# Altium PCB Board.PcbDoc (part 3 of 3)
Units mm, origin at the board's own origin, x right, y up, seen from the top; angles counter-clockwise.
Board outline 220 x 125 mm, 2 copper layers (Top Layer, Bottom Layer); 325 components, 197 nets, 1030 pads, 170 vias.
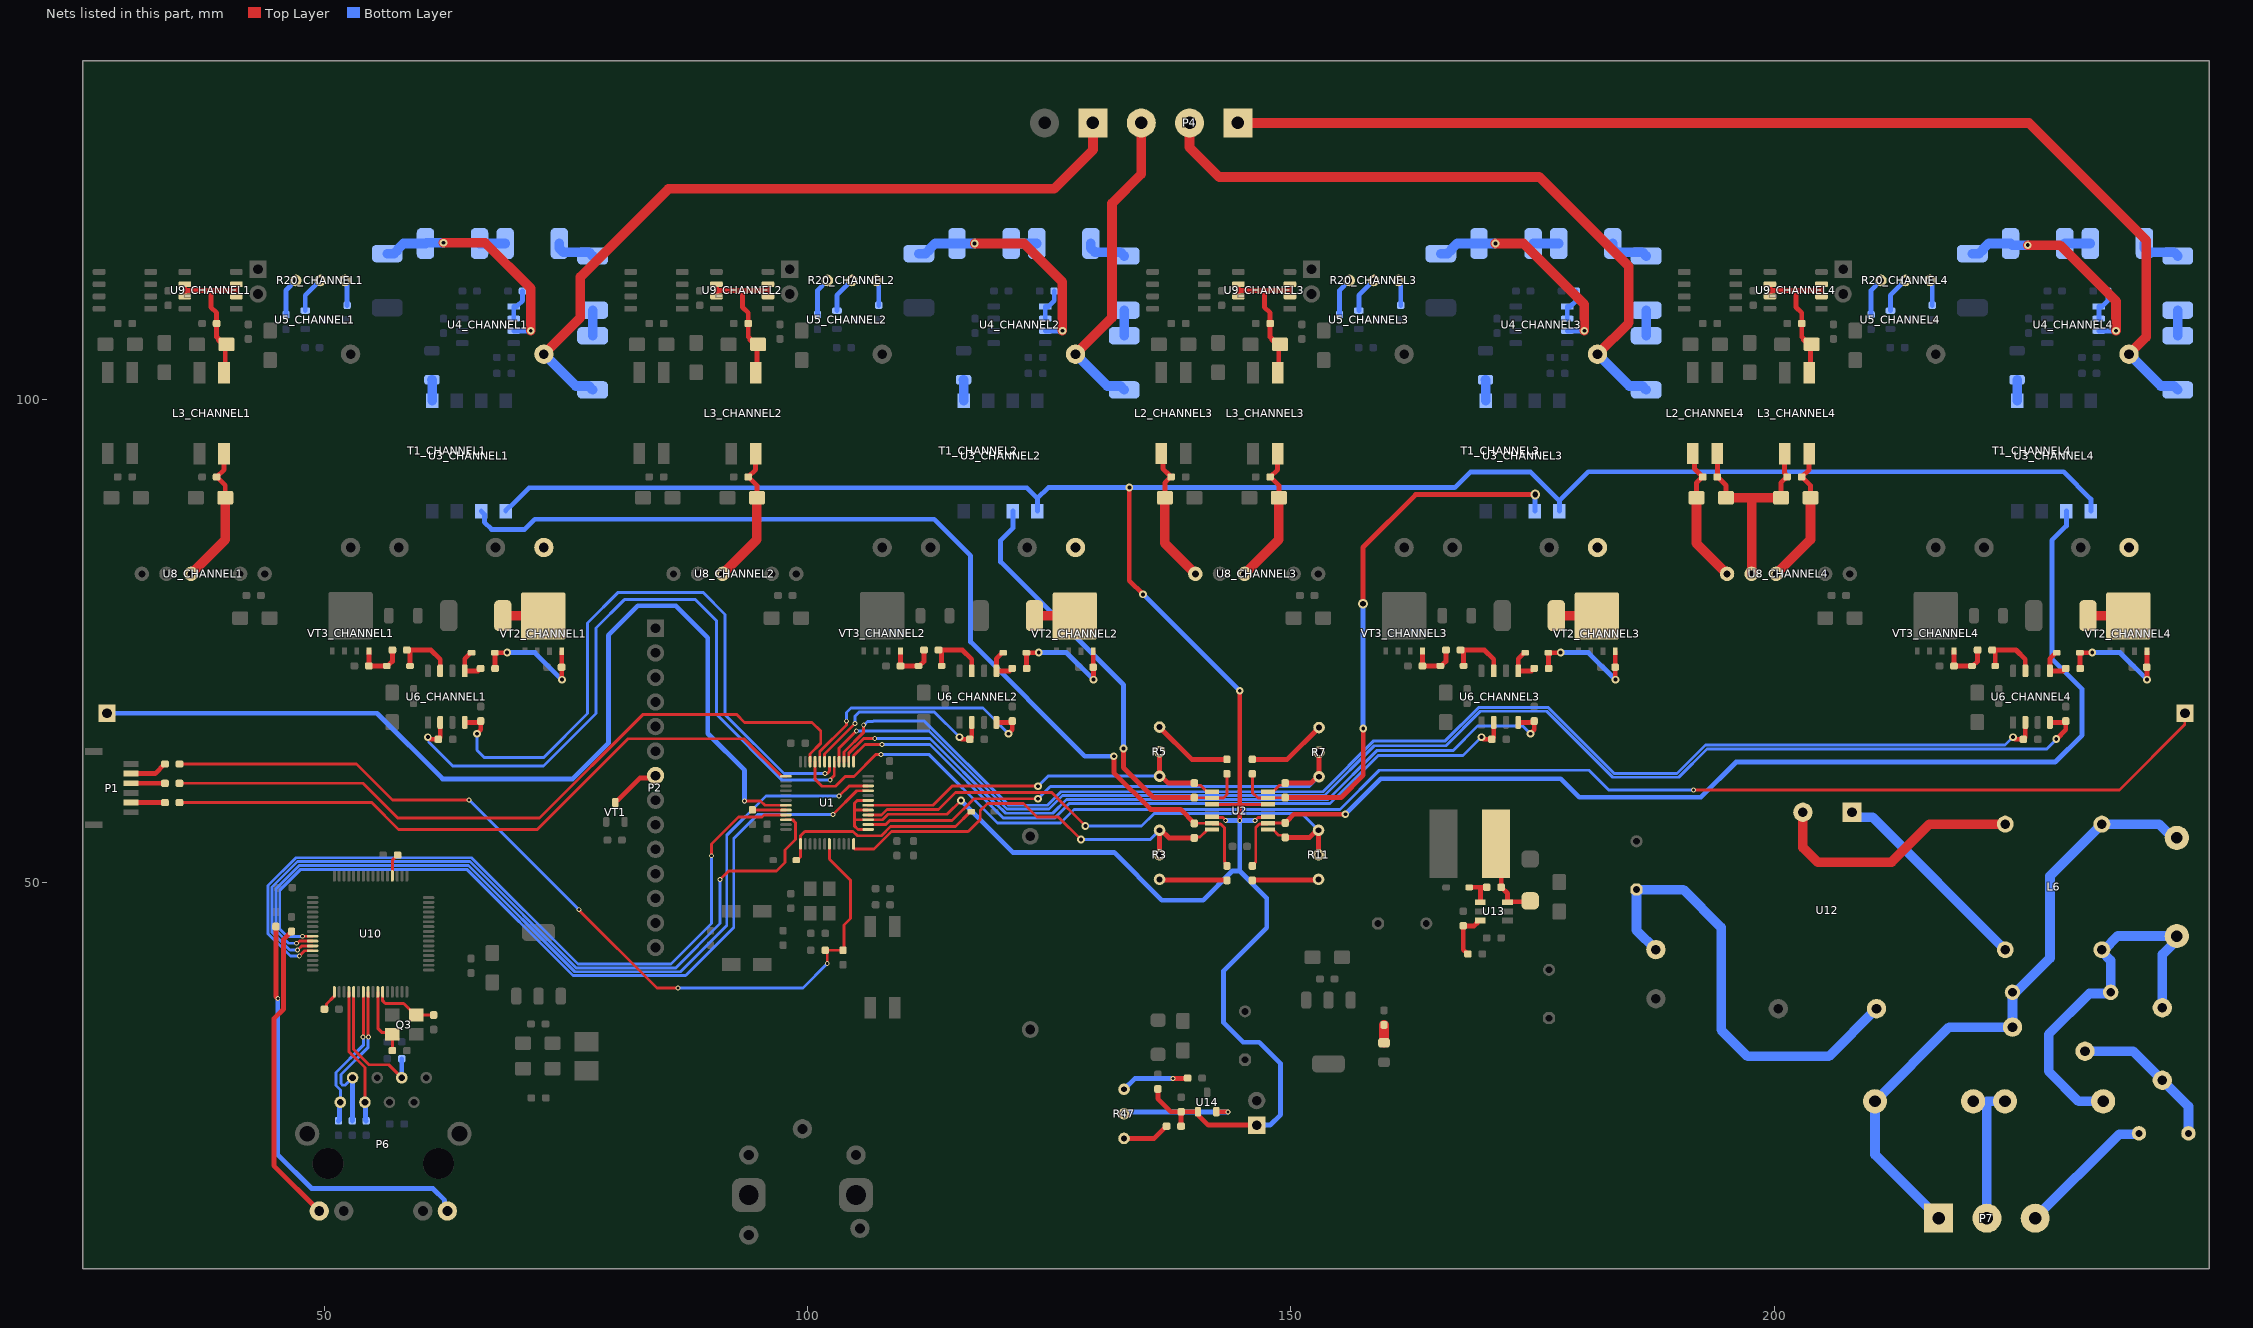
[diagram p3: the nets of this part, all layers, seen from the top]

## Via types
v1: diameter 0.8, hole 0.4, Top Layer to Bottom Layer, 99 vias
v2: diameter 0.5, hole 0.3, Top Layer to Bottom Layer, 49 vias
v3: diameter 1, hole 0.6, Top Layer to Bottom Layer, 22 vias

## Nets (pads, with @x,y where several pads share a name; then routed paths per layer and width w, separated by ;. In a path a pad name is that pad's centre, name@x,y a point inside that pad or via, vN(x,y) a via of type N, cw(c..) or ccw(c..) an arc to the next point about the centre after c; other vN are vias at no path point) (continued)
NetC24_CHANNEL3_2: C24_CHANNEL3.2 C25_CHANNEL3.1 L2_CHANNEL3.3 U8_CHANNEL3.6 | length 14.5
  Top Layer w0.5: L2_CHANNEL3.3@136.583,94.361 136.747,94.197 136.747,92.804 137.453,92.098 137.453,92.073 C24_CHANNEL3.2@137.578,91.948 ; C25_CHANNEL3.1@136.955,89.789 136.955,91.325 C24_CHANNEL3.2@137.578,91.948 ; C24_CHANNEL3.2@137.603,91.948 C24_CHANNEL3.2@137.578,91.948
  Top Layer w1: C25_CHANNEL3.1@136.955,89.789 136.955,85.075 U8_CHANNEL3.6@140.115,81.915
NetC24_CHANNEL4_1: C24_CHANNEL4.1 C25_CHANNEL4.2 C28_CHANNEL4.2 C29_CHANNEL4.1 L2_CHANNEL4.4 L3_CHANNEL4.3 U8_CHANNEL4.5 | length 23.6
  Top Layer w0.5: C24_CHANNEL4.1@194.103,91.948 C24_CHANNEL4.1@194.128,91.948 ; L2_CHANNEL4.4@194.128,94.607 C24_CHANNEL4.1@194.128,91.948 ; C25_CHANNEL4.2@195.005,89.789 195.005,91.071 C24_CHANNEL4.1@194.128,91.948 ; C29_CHANNEL4.1@200.694,89.789 200.694,91.325 C28_CHANNEL4.2@201.317,91.948 ; L3_CHANNEL4.3@201.072,94.335 201.072,92.366 201.192,92.246 201.192,92.073 C28_CHANNEL4.2@201.317,91.948 ; C28_CHANNEL4.2@201.342,91.948 C28_CHANNEL4.2@201.317,91.948
  Top Layer w1: C25_CHANNEL4.2@195.005,89.789 C29_CHANNEL4.1@200.694,89.789 ; U8_CHANNEL4.5@197.655,81.915 197.655,89.709
NetC24_CHANNEL4_2: C24_CHANNEL4.2 C25_CHANNEL4.1 L2_CHANNEL4.3 U8_CHANNEL4.6 | length 14.5
  Top Layer w0.5: L2_CHANNEL4.3@191.583,94.361 191.747,94.197 191.747,92.804 192.453,92.098 192.453,92.073 C24_CHANNEL4.2@192.578,91.948 ; C25_CHANNEL4.1@191.955,89.789 191.955,91.325 C24_CHANNEL4.2@192.578,91.948 ; C24_CHANNEL4.2@192.603,91.948 C24_CHANNEL4.2@192.578,91.948
  Top Layer w1: C25_CHANNEL4.1@191.955,89.789 191.955,85.075 U8_CHANNEL4.6@195.115,81.915
NetC28_CHANNEL1_1: C28_CHANNEL1.1 C29_CHANNEL1.2 L3_CHANNEL1.4 U8_CHANNEL1.4 | length 14.6
  Top Layer w0.5: C28_CHANNEL1.1@38.842,91.948 C28_CHANNEL1.1@38.867,91.948 ; L3_CHANNEL1.4@39.612,94.335 39.612,92.693 C28_CHANNEL1.1@38.867,91.948 ; C29_CHANNEL1.2@39.744,89.789 39.744,91.071 C28_CHANNEL1.1@38.867,91.948
  Top Layer w1: U8_CHANNEL1.4@36.195,81.915 39.744,85.464 C29_CHANNEL1.2@39.744,89.789
NetC28_CHANNEL2_1: C28_CHANNEL2.1 C29_CHANNEL2.2 L3_CHANNEL2.4 U8_CHANNEL2.4 | length 14.6
  Top Layer w0.5: C28_CHANNEL2.1@93.842,91.948 C28_CHANNEL2.1@93.867,91.948 ; L3_CHANNEL2.4@94.612,94.335 94.612,92.693 C28_CHANNEL2.1@93.867,91.948 ; C29_CHANNEL2.2@94.744,89.789 94.744,91.071 C28_CHANNEL2.1@93.867,91.948
  Top Layer w1: U8_CHANNEL2.4@91.195,81.915 94.744,85.464 C29_CHANNEL2.2@94.744,89.789
NetC28_CHANNEL3_1: C28_CHANNEL3.1 C29_CHANNEL3.2 L3_CHANNEL3.4 U8_CHANNEL3.4 | length 14.6
  Top Layer w0.5: C28_CHANNEL3.1@147.842,91.948 C28_CHANNEL3.1@147.867,91.948 ; L3_CHANNEL3.4@148.612,94.335 148.612,92.693 C28_CHANNEL3.1@147.867,91.948 ; C29_CHANNEL3.2@148.744,89.789 148.744,91.071 C28_CHANNEL3.1@147.867,91.948
  Top Layer w1: U8_CHANNEL3.4@145.195,81.915 148.744,85.464 C29_CHANNEL3.2@148.744,89.789
NetC28_CHANNEL4_1: C28_CHANNEL4.1 C29_CHANNEL4.2 L3_CHANNEL4.4 U8_CHANNEL4.4 | length 14.6
  Top Layer w0.5: C28_CHANNEL4.1@202.842,91.948 C28_CHANNEL4.1@202.867,91.948 ; L3_CHANNEL4.4@203.612,94.335 203.612,92.693 C28_CHANNEL4.1@202.867,91.948 ; C29_CHANNEL4.2@203.744,89.789 203.744,91.071 C28_CHANNEL4.1@202.867,91.948
  Top Layer w1: U8_CHANNEL4.4@200.195,81.915 203.744,85.464 C29_CHANNEL4.2@203.744,89.789
NetC30_CHANNEL1_1: C30_CHANNEL1.1 C31_CHANNEL1.2 L3_CHANNEL1.1 U9_CHANNEL1.2 U9_CHANNEL1.3 U9_CHANNEL1.6 U9_CHANNEL1.7 | length 17.1
  Top Layer w0.5: U9_CHANNEL1.7@35.552,110.617 35.552,111.252 ; U9_CHANNEL1.6@35.552,111.887 35.552,111.252 ; L3_CHANNEL1.1@39.612,102.735 39.74,102.862 39.74,105.536 C31_CHANNEL1.2@39.867,105.664 ; C31_CHANNEL1.2@39.617,105.664 39.492,105.664 39.042,106.114 39.042,106.239 38.842,106.439 C30_CHANNEL1.1@38.842,107.823 38.842,108.933 38.25,109.525 38.25,111.252 ; U9_CHANNEL1.2@40.886,110.617 40.886,111.252 ; U9_CHANNEL1.3@40.886,111.887 40.886,111.252 ; 35.552,111.252 38.25,111.252 ; 38.25,111.252 40.886,111.252
NetC30_CHANNEL2_1: C30_CHANNEL2.1 C31_CHANNEL2.2 L3_CHANNEL2.1 U9_CHANNEL2.2 U9_CHANNEL2.3 U9_CHANNEL2.6 U9_CHANNEL2.7 | length 17.1
  Top Layer w0.5: U9_CHANNEL2.7@90.552,110.617 90.552,111.252 ; U9_CHANNEL2.6@90.552,111.887 90.552,111.252 ; L3_CHANNEL2.1@94.612,102.735 94.74,102.862 94.74,105.536 C31_CHANNEL2.2@94.867,105.664 ; C31_CHANNEL2.2@94.617,105.664 94.492,105.664 94.042,106.114 94.042,106.239 93.842,106.439 C30_CHANNEL2.1@93.842,107.823 93.842,108.933 93.25,109.525 93.25,111.252 ; U9_CHANNEL2.2@95.886,110.617 95.886,111.252 ; U9_CHANNEL2.3@95.886,111.887 95.886,111.252 ; 90.552,111.252 93.25,111.252 ; 93.25,111.252 95.886,111.252
NetC30_CHANNEL3_1: C30_CHANNEL3.1 C31_CHANNEL3.2 L3_CHANNEL3.1 U9_CHANNEL3.2 U9_CHANNEL3.3 U9_CHANNEL3.6 U9_CHANNEL3.7 | length 17.1
  Top Layer w0.5: U9_CHANNEL3.7@144.552,110.617 144.552,111.252 ; U9_CHANNEL3.6@144.552,111.887 144.552,111.252 ; L3_CHANNEL3.1@148.612,102.735 148.74,102.862 148.74,105.536 C31_CHANNEL3.2@148.867,105.664 ; C31_CHANNEL3.2@148.617,105.664 148.492,105.664 148.042,106.114 148.042,106.239 147.842,106.439 C30_CHANNEL3.1@147.842,107.823 147.842,108.933 147.25,109.525 147.25,111.252 ; U9_CHANNEL3.2@149.886,110.617 149.886,111.252 ; U9_CHANNEL3.3@149.886,111.887 149.886,111.252 ; 144.552,111.252 147.25,111.252 ; 147.25,111.252 149.886,111.252
NetC30_CHANNEL4_1: C30_CHANNEL4.1 C31_CHANNEL4.2 L3_CHANNEL4.1 U9_CHANNEL4.2 U9_CHANNEL4.3 U9_CHANNEL4.6 U9_CHANNEL4.7 | length 17.1
  Top Layer w0.5: U9_CHANNEL4.7@199.552,110.617 199.552,111.252 ; U9_CHANNEL4.6@199.552,111.887 199.552,111.252 ; L3_CHANNEL4.1@203.612,102.735 203.74,102.862 203.74,105.536 C31_CHANNEL4.2@203.867,105.664 ; C31_CHANNEL4.2@203.617,105.664 203.492,105.664 203.042,106.114 203.042,106.239 202.842,106.439 C30_CHANNEL4.1@202.842,107.823 202.842,108.933 202.25,109.525 202.25,111.252 ; U9_CHANNEL4.2@204.886,110.617 204.886,111.252 ; U9_CHANNEL4.3@204.886,111.887 204.886,111.252 ; 199.552,111.252 202.25,111.252 ; 202.25,111.252 204.886,111.252
NetC36_2: C36.2 U10.36 | length 2.4
  Top Layer w0.3: U10.36@57.025,50.675 57.025,52.28 57.57,52.825 C36.2@57.575,52.825
NetC37_2: C37.2 Q3.1 U10.10 | length 7.2
  Top Layer w0.3: U10.10@55.525,38.675 55.525,34.9 55.976,34.449 56.826,34.449 57.025,34.25 C37.2@57.025,32.6
NetC38_2: C38.2 Q3.3 U10.11 | length 6.8
  Top Layer w0.3: U10.11@56.025,38.675 56.025,37.751 56.301,37.475 58.2,37.475 59.4,36.275 Q3.3@59.5,36.275 C38.2@61.3,36.275
NetC44_1: C44.1 C48.2 L6.2 P7.1 R43.1 Vr1.1 | length 65.4
  Bottom Layer w1: P7.1@217,15.25 210.42,21.83 C48.2@210.42,27.35 218.095,35.025 Vr1.1@224.65,35.025 224.65,38.275 228.525,42.15 228.525,50.65 L6.2@233.9,56.025 239.824,56.025 241.244,54.605 C44.1@241.65,54.605
NetC44_2: C44.2 C49.2 L6.1 R43.2 Th1.2 | length 40.1
  Bottom Layer w1: C49.2@234.03,27.35 231.5,27.35 228.4,30.45 228.4,34.3 232.61,38.51 234.69,38.51 R43.2@234.805,38.625 234.805,41.917 233.9,42.822 L6.1@233.9,43.025 234.103,43.025 235.523,44.445 C44.2@241.65,44.445 241.65,44.039 240.15,42.539 Th1.2@240.15,37.025
NetC45_1: C45.1 L5.1 U12.3 | length 47.3
  Bottom Layer w1: L5.1@187.75,43.04 185.75,45.04 C45.1@185.75,49.25 190.6,49.25 194.5,45.35 194.5,34.75 197.25,32 205.65,32 U12.3@210.58,36.93
NetC48_1: C48.1 C49.1 P7.2 | length 14
  Bottom Layer w1: P7.2@222,15.25 222,27.325 222.025,27.35 C49.1@223.87,27.35
NetC50_1: C50.1 U13.1 VD5.2 | length 3.3
  Top Layer w0.5: VD5.2@168.45,49.475 168.463,49.487 170.237,49.487 C50.1@170.25,49.5 ; U13.1@169.6,47.95 169.6,49.425
NetC50_2: C50.2 L7.1 U13.6 VD6.2 | length 9
  Top Layer w0.5: L7.1@171.2,54 171.75,53.45 C50.2@171.75,49.5 171.775,49.5 172.4,48.875 U13.6@172.4,47.95 172.45,48 174.659,48 VD6.2@174.75,48.091
NetF1_1: F1.1 P7.3 | length 14.4
  Bottom Layer w1: P7.3@227,15.25 235.679,23.929 237.639,23.929 F1.1@237.735,24.025
NetF1_2: F1.2 Th1.1 Vr1.2 | length 15.9
  Bottom Layer w1: Vr1.2@232.15,32.525 237.15,32.525 Th1.1@240.15,29.525 242.855,26.82 F1.2@242.855,24.025
NetL6_3: L6.3 U12.2 | length 26.8
  Top Layer w1: U12.2@202.96,57.25 202.96,53.615 204.486,52.089 212.124,52.089 216.059,56.025 L6.3@223.9,56.025
NetL6_4: L6.4 U12.1 | length 21.8
  Bottom Layer w1: U12.1@208.04,57.25 208.54,56.75 210.175,56.75 L6.4@223.9,43.025
NetP1_2: P1.2 R15.1 | length 3.9
  Top Layer w0.5: P1.2@30,61.25 32.475,61.25 33.475,62.25 R15.1@33.5,62.25
NetP1_3: P1.3 R14.1 | length 3.5
  Top Layer w0.5: P1.3@30,60.25 R14.1@33.5,60.25
NetP1_5: P1.5 R13.1 | length 3.5
  Top Layer w0.5: P1.5@30,58.25 R13.1@33.5,58.25
NetP2_7: P2.7 VT1.3 | length 5.4
  Top Layer w0.5: VT1.3@80.083,58.267 VT1.3@80.1,58.25 80.1,58.425 80.175,58.5 80.35,58.5 82.641,60.791 84.001,60.791 P2.7@84.25,61.04
NetP6_9: P6.9 R39.2 | length 31.6
  Top Layer w0.5: R39.2@46.6,44.925 46.6,44.9 46.475,44.775 46.45,44.775 45.775,44.1 45.775,36.9 44.775,35.9 44.775,20.685 P6.9@49.46,16
NetP6_12: P6.12 R41.2 | length 44.1
  Top Layer w0.5: R41.2@44.975,45.425 44.975,38.175 v2(45.175,37.975)
  Bottom Layer w0.5: v2(45.175,37.975) 45.175,21.825 48.675,18.325 61.225,18.325 62.433,17.117 62.433,16.287 P6.12@62.72,16
NetP9_1: P9.1 U1.43 | length 103.2
  Top Layer w0.3: v2(93.472,58.42) 95.123,58.42 95.568,57.975 U1.43@97.75,57.975
  Bottom Layer w0.5: P9.1@27.5,67.5 55.436,67.5 62.23,60.706 75.692,60.706 79.375,64.389 79.375,75.565 82.423,78.613 86.36,78.613 89.662,75.311 89.662,65.405 93.472,61.595 v2(93.472,58.42)
NetP10_1: P10.1 U1.33 | length 155.2
  Top Layer w0.3: U1.33@100.75,62.475 100.75,60.667 101.473,59.944 102.87,59.944 103.886,60.96 104.775,60.96 107.061,63.246 v2(107.569,63.246) ; v2(191.643,59.563) 235.712,59.563 242.475,66.326 242.475,67.475 P10.1@242.5,67.5
  Bottom Layer w0.3: v2(107.569,63.246) 112.522,63.246 119.634,56.134 126.15,56.134 127.547,57.531 155.067,57.531 159.131,61.595 180.848,61.595 182.88,59.563 v2(191.643,59.563)
NetR3_1: R3.1 R4.2 | length 7
  Top Layer w0.5: R3.1@136.4,50.31 136.455,50.255 143.32,50.255 R4.2@143.375,50.2
NetR5_1: R5.1 R6.2 | length 8.4
  Top Layer w0.5: R5.1@136.4,66.065 139.74,62.725 R6.2@143.375,62.725
NetR7_1: R7.1 R8.2 | length 8.3
  Top Layer w0.5: R8.2@146,62.725 149.61,62.725 R7.1@152.9,66.015
NetR9_1: R9.1 U1.44 | length 3.6
  Top Layer w0.3: R9.1@94.175,57.45 94.2,57.475 U1.44@97.75,57.475
NetR11_1: R11.1 R12.2 | length 6.9
  Top Layer w0.5: R12.2@146,50.2 146.055,50.255 152.795,50.255 R11.1@152.85,50.31
NetR17_CHANNEL1_1: R17_CHANNEL1.1 U4_CHANNEL1.1 U4_CHANNEL1.2 | length 3.4
  Bottom Layer w0.5: U4_CHANNEL1.2@69.584,108.327 69.584,109.567 69.599,109.582 U4_CHANNEL1.1@69.9,109.582 ; U4_CHANNEL1.1@69.9,109.583 69.969,109.652 70.5,110.182 R17_CHANNEL1.1@70.5,111.172
NetR17_CHANNEL2_1: R17_CHANNEL2.1 U4_CHANNEL2.1 U4_CHANNEL2.2 | length 3.4
  Bottom Layer w0.5: U4_CHANNEL2.2@124.584,108.327 124.584,109.567 124.599,109.582 U4_CHANNEL2.1@124.9,109.582 ; U4_CHANNEL2.1@124.9,109.583 124.969,109.652 125.5,110.182 R17_CHANNEL2.1@125.5,111.172
NetR17_CHANNEL3_1: R17_CHANNEL3.1 U4_CHANNEL3.1 U4_CHANNEL3.2 | length 3.4
  Bottom Layer w0.5: U4_CHANNEL3.2@178.584,108.327 178.584,109.567 178.599,109.582 U4_CHANNEL3.1@178.9,109.582 ; U4_CHANNEL3.1@178.9,109.583 U4_CHANNEL3.1@178.969,109.652 ; U4_CHANNEL3.1@178.97,109.652 179.5,110.182 R17_CHANNEL3.1@179.5,111.172
NetR17_CHANNEL4_1: R17_CHANNEL4.1 U4_CHANNEL4.1 U4_CHANNEL4.2 | length 3.4
  Bottom Layer w0.5: U4_CHANNEL4.2@233.584,108.327 233.584,109.567 233.599,109.582 U4_CHANNEL4.1@233.9,109.582 ; U4_CHANNEL4.1@233.9,109.583 233.969,109.652 234.5,110.182 R17_CHANNEL4.1@234.5,111.172
NetR18_CHANNEL1_2: R18_CHANNEL1.2 U3_CHANNEL1.1 | length 2.2
  Bottom Layer w1: R18_CHANNEL1.2@61.125,102 61.145,102 U3_CHANNEL1.1@61.145,99.839
NetR18_CHANNEL2_2: R18_CHANNEL2.2 U3_CHANNEL2.1 | length 2.2
  Bottom Layer w1: R18_CHANNEL2.2@116.125,102 116.145,102 U3_CHANNEL2.1@116.145,99.839
NetR18_CHANNEL3_2: R18_CHANNEL3.2 U3_CHANNEL3.1 | length 2.2
  Bottom Layer w1: R18_CHANNEL3.2@170.125,102 170.145,102 U3_CHANNEL3.1@170.145,99.839
NetR18_CHANNEL4_2: R18_CHANNEL4.2 U3_CHANNEL4.1 | length 2.2
  Bottom Layer w1: R18_CHANNEL4.2@225.125,102 225.145,102 U3_CHANNEL4.1@225.145,99.839
NetR19_CHANNEL1_1: R19_CHANNEL1.1 R20_CHANNEL1.1 | length 2.7
  Bottom Layer w0.5: R20_CHANNEL1.1@52.115,112.275 52.115,112.086 52.35,111.851 R19_CHANNEL1.1@52.35,109.7
NetR19_CHANNEL2_1: R19_CHANNEL2.1 R20_CHANNEL2.1 | length 2.7
  Bottom Layer w0.5: R20_CHANNEL2.1@107.115,112.275 107.115,112.086 107.35,111.851 R19_CHANNEL2.1@107.35,109.7
NetR19_CHANNEL3_1: R19_CHANNEL3.1 R20_CHANNEL3.1 | length 2.7
  Bottom Layer w0.5: R20_CHANNEL3.1@161.115,112.275 161.115,112.086 161.35,111.851 R19_CHANNEL3.1@161.35,109.7
NetR19_CHANNEL4_1: R19_CHANNEL4.1 R20_CHANNEL4.1 | length 2.7
  Bottom Layer w0.5: R20_CHANNEL4.1@216.115,112.275 216.115,112.086 216.35,111.851 R19_CHANNEL4.1@216.35,109.7
NetR20_CHANNEL1_2: R20_CHANNEL1.2 U5_CHANNEL1.2 | length 3.8
  Bottom Layer w0.5: U5_CHANNEL1.2@48.022,109.154 48.022,110.722 R20_CHANNEL1.2@49.575,112.275
NetR20_CHANNEL1_3: R20_CHANNEL1.3 R21_CHANNEL1.2 | length 4
  Bottom Layer w0.5: R21_CHANNEL1.2@46.025,108.725 46.025,111.265 R20_CHANNEL1.3@47.035,112.275
NetR20_CHANNEL2_2: R20_CHANNEL2.2 U5_CHANNEL2.2 | length 3.8
  Bottom Layer w0.5: U5_CHANNEL2.2@103.022,109.154 103.022,110.722 R20_CHANNEL2.2@104.575,112.275
NetR20_CHANNEL2_3: R20_CHANNEL2.3 R21_CHANNEL2.2 | length 4
  Bottom Layer w0.5: R21_CHANNEL2.2@101.025,108.725 101.025,111.265 R20_CHANNEL2.3@102.035,112.275
NetR20_CHANNEL3_2: R20_CHANNEL3.2 U5_CHANNEL3.2 | length 3.8
  Bottom Layer w0.5: U5_CHANNEL3.2@157.022,109.154 157.022,110.722 R20_CHANNEL3.2@158.575,112.275
NetR20_CHANNEL3_3: R20_CHANNEL3.3 R21_CHANNEL3.2 | length 4
  Bottom Layer w0.5: R21_CHANNEL3.2@155.025,108.725 155.025,111.265 R20_CHANNEL3.3@156.035,112.275
NetR20_CHANNEL4_2: R20_CHANNEL4.2 U5_CHANNEL4.2 | length 3.8
  Bottom Layer w0.5: U5_CHANNEL4.2@212.022,109.154 212.022,110.722 R20_CHANNEL4.2@213.575,112.275
NetR20_CHANNEL4_3: R20_CHANNEL4.3 R21_CHANNEL4.2 | length 4
  Bottom Layer w0.5: R21_CHANNEL4.2@210.025,108.725 210.025,111.265 R20_CHANNEL4.3@211.035,112.275
NetR23_CHANNEL1_1: R23_CHANNEL1.1 U6_CHANNEL1.5 VD3_CHANNEL1.2 | length 4
  Top Layer w0.5: VD3_CHANNEL1.2@65.225,73.75 65.125,73.75 64.516,73.141 U6_CHANNEL1.5@64.516,71.882 65.883,71.882 66.132,72.131 R23_CHANNEL1.1@66.157,72.131
NetR23_CHANNEL1_2: R23_CHANNEL1.2 R25_CHANNEL1.2 VD3_CHANNEL1.1 VT2_CHANNEL1.1 | length 12.7
  Top Layer w0.5: R23_CHANNEL1.2@67.657,72.131 67.641,72.147 67.641,73.734 VD3_CHANNEL1.1@67.625,73.75 68.875,73.75 v1(68.9,73.775) ; VT2_CHANNEL1.1@74.549,73.914 74.549,72.275 74.556,72.268 74.556,70.994 v1(74.575,70.975)
  Bottom Layer w0.5: v1(68.9,73.775) 71.775,73.775 v1(74.575,70.975)
NetR23_CHANNEL2_1: R23_CHANNEL2.1 U6_CHANNEL2.5 VD3_CHANNEL2.2 | length 4
  Top Layer w0.5: VD3_CHANNEL2.2@120.225,73.75 120.125,73.75 119.516,73.141 U6_CHANNEL2.5@119.516,71.882 120.883,71.882 121.132,72.131 R23_CHANNEL2.1@121.157,72.131
NetR23_CHANNEL2_2: R23_CHANNEL2.2 R25_CHANNEL2.2 VD3_CHANNEL2.1 VT2_CHANNEL2.1 | length 12.7
  Top Layer w0.5: R23_CHANNEL2.2@122.657,72.131 122.641,72.147 122.641,73.734 VD3_CHANNEL2.1@122.625,73.75 123.875,73.75 v1(123.9,73.775) ; VT2_CHANNEL2.1@129.549,73.914 129.549,72.275 129.556,72.268 129.556,70.994 v1(129.575,70.975)
  Bottom Layer w0.5: v1(123.9,73.775) 126.775,73.775 v1(129.575,70.975)
NetR23_CHANNEL3_1: R23_CHANNEL3.1 U6_CHANNEL3.5 VD3_CHANNEL3.2 | length 4
  Top Layer w0.5: VD3_CHANNEL3.2@174.225,73.75 174.125,73.75 173.516,73.141 U6_CHANNEL3.5@173.516,71.882 174.883,71.882 175.132,72.131 R23_CHANNEL3.1@175.157,72.131
NetR23_CHANNEL3_2: R23_CHANNEL3.2 R25_CHANNEL3.2 VD3_CHANNEL3.1 VT2_CHANNEL3.1 | length 12.7
  Top Layer w0.5: R23_CHANNEL3.2@176.657,72.131 176.641,72.147 176.641,73.734 VD3_CHANNEL3.1@176.625,73.75 177.875,73.75 v1(177.9,73.775) ; VT2_CHANNEL3.1@183.549,73.914 183.549,72.275 183.556,72.268 183.556,70.994 v1(183.575,70.975)
  Bottom Layer w0.5: v1(177.9,73.775) 180.775,73.775 v1(183.575,70.975)
NetR23_CHANNEL4_1: R23_CHANNEL4.1 U6_CHANNEL4.5 VD3_CHANNEL4.2 | length 4
  Top Layer w0.5: VD3_CHANNEL4.2@229.225,73.75 229.125,73.75 228.516,73.141 U6_CHANNEL4.5@228.516,71.882 229.883,71.882 230.132,72.131 R23_CHANNEL4.1@230.157,72.131
NetR23_CHANNEL4_2: R23_CHANNEL4.2 R25_CHANNEL4.2 VD3_CHANNEL4.1 VT2_CHANNEL4.1 | length 12.7
  Top Layer w0.5: R23_CHANNEL4.2@231.657,72.131 231.641,72.147 231.641,73.734 VD3_CHANNEL4.1@231.625,73.75 232.875,73.75 v1(232.9,73.775) ; VT2_CHANNEL4.1@238.549,73.914 238.549,72.275 238.556,72.268 238.556,70.994 v1(238.575,70.975)
  Bottom Layer w0.5: v1(232.9,73.775) 235.775,73.775 v1(238.575,70.975)
NetR24_CHANNEL1_2: R24_CHANNEL1.2 T1_CHANNEL1.6 VT2_CHANNEL1.2 | length 4.2
  Top Layer w1: R24_CHANNEL1.2@68.459,77.597 72.611,77.597 VT2_CHANNEL1.2@72.644,77.564
NetR24_CHANNEL2_2: R24_CHANNEL2.2 T1_CHANNEL2.6 VT2_CHANNEL2.2 | length 4.2
  Top Layer w1: R24_CHANNEL2.2@123.459,77.597 127.611,77.597 VT2_CHANNEL2.2@127.644,77.564
NetR24_CHANNEL3_2: R24_CHANNEL3.2 T1_CHANNEL3.6 VT2_CHANNEL3.2 | length 4.2
  Top Layer w1: R24_CHANNEL3.2@177.459,77.597 181.611,77.597 VT2_CHANNEL3.2@181.644,77.564
NetR24_CHANNEL4_2: R24_CHANNEL4.2 T1_CHANNEL4.6 VT2_CHANNEL4.2 | length 4.2
  Top Layer w1: R24_CHANNEL4.2@232.459,77.597 236.611,77.597 VT2_CHANNEL4.2@236.644,77.564
NetR26_CHANNEL1_1: R26_CHANNEL1.1 R28_CHANNEL1.2 | length 2.6
  Bottom Layer w1: R26_CHANNEL1.1@77.75,106.55 R28_CHANNEL1.2@77.75,109.2
NetR26_CHANNEL2_1: R26_CHANNEL2.1 R28_CHANNEL2.2 | length 2.6
  Bottom Layer w1: R26_CHANNEL2.1@132.75,106.55 R28_CHANNEL2.2@132.75,109.2
NetR26_CHANNEL3_1: R26_CHANNEL3.1 R28_CHANNEL3.2 | length 2.6
  Bottom Layer w1: R26_CHANNEL3.1@186.75,106.55 R28_CHANNEL3.2@186.75,109.2
NetR26_CHANNEL4_1: R26_CHANNEL4.1 R28_CHANNEL4.2 | length 2.6
  Bottom Layer w1: R26_CHANNEL4.1@241.75,106.55 R28_CHANNEL4.2@241.75,109.2
NetR28_CHANNEL1_1: R28_CHANNEL1.1 R29_CHANNEL1.2 | length 4.3
  Bottom Layer w1: R29_CHANNEL1.2@74.3,116.098 74.3,115.6 74.7,115.2 77.35,115.2 R28_CHANNEL1.1@77.75,114.8
NetR28_CHANNEL2_1: R28_CHANNEL2.1 R29_CHANNEL2.2 | length 4.3
  Bottom Layer w1: R29_CHANNEL2.2@129.3,116.098 129.3,115.6 129.7,115.2 132.35,115.2 R28_CHANNEL2.1@132.75,114.8
NetR28_CHANNEL3_1: R28_CHANNEL3.1 R29_CHANNEL3.2 | length 4.3
  Bottom Layer w1: R29_CHANNEL3.2@183.3,116.098 183.3,115.6 183.7,115.2 186.35,115.2 R28_CHANNEL3.1@186.75,114.8
NetR28_CHANNEL4_1: R28_CHANNEL4.1 R29_CHANNEL4.2 | length 4.3
  Bottom Layer w1: R29_CHANNEL4.2@238.3,116.098 238.3,115.6 238.7,115.2 241.35,115.2 R28_CHANNEL4.1@241.75,114.8
NetR29_CHANNEL1_1: R29_CHANNEL1.1 R30_CHANNEL1.2 | length 2.6
  Bottom Layer w1: R30_CHANNEL1.2@66.05,116.098 R29_CHANNEL1.1@68.7,116.098
NetR29_CHANNEL2_1: R29_CHANNEL2.1 R30_CHANNEL2.2 | length 2.6
  Bottom Layer w1: R30_CHANNEL2.2@121.05,116.098 R29_CHANNEL2.1@123.7,116.098
NetR29_CHANNEL3_1: R29_CHANNEL3.1 R30_CHANNEL3.2 | length 2.6
  Bottom Layer w1: R30_CHANNEL3.2@175.05,116.098 R29_CHANNEL3.1@177.7,116.098
NetR29_CHANNEL4_1: R29_CHANNEL4.1 R30_CHANNEL4.2 | length 2.6
  Bottom Layer w1: R30_CHANNEL4.2@230.05,116.098 R29_CHANNEL4.1@232.7,116.098
NetR31_CHANNEL1_1: R31_CHANNEL1.1 U6_CHANNEL1.7 VD4_CHANNEL1.2 | length 6.4
  Top Layer w0.5: VD4_CHANNEL1.2@58.858,72.39 58.858,74.008 58.825,74.041 61.009,74.041 61.976,73.074 U6_CHANNEL1.7@61.976,71.882
NetR31_CHANNEL1_2: R31_CHANNEL1.2 R32_CHANNEL1.2 VD4_CHANNEL1.1 VT3_CHANNEL1.1 | length 5.4
  Top Layer w0.5: VT3_CHANNEL1.1@54.61,73.947 54.61,72.402 R32_CHANNEL1.2@54.598,72.39 VD4_CHANNEL1.1@56.458,72.39 56.558,72.39 57.035,72.867 R31_CHANNEL1.2@57.035,74.041
NetR31_CHANNEL2_1: R31_CHANNEL2.1 U6_CHANNEL2.7 VD4_CHANNEL2.2 | length 6.4
  Top Layer w0.5: VD4_CHANNEL2.2@113.858,72.39 113.858,74.008 113.825,74.041 116.009,74.041 116.976,73.074 U6_CHANNEL2.7@116.976,71.882
NetR31_CHANNEL2_2: R31_CHANNEL2.2 R32_CHANNEL2.2 VD4_CHANNEL2.1 VT3_CHANNEL2.1 | length 5.4
  Top Layer w0.5: VT3_CHANNEL2.1@109.61,73.947 109.61,72.402 R32_CHANNEL2.2@109.598,72.39 VD4_CHANNEL2.1@111.458,72.39 111.558,72.39 112.035,72.867 R31_CHANNEL2.2@112.035,74.041
NetR31_CHANNEL3_1: R31_CHANNEL3.1 U6_CHANNEL3.7 VD4_CHANNEL3.2 | length 6.4
  Top Layer w0.5: VD4_CHANNEL3.2@167.858,72.39 167.858,74.008 167.825,74.041 170.009,74.041 170.976,73.074 U6_CHANNEL3.7@170.976,71.882
NetR31_CHANNEL3_2: R31_CHANNEL3.2 R32_CHANNEL3.2 VD4_CHANNEL3.1 VT3_CHANNEL3.1 | length 5.4
  Top Layer w0.5: VT3_CHANNEL3.1@163.61,73.947 163.61,72.402 R32_CHANNEL3.2@163.598,72.39 VD4_CHANNEL3.1@165.458,72.39 165.558,72.39 166.035,72.867 R31_CHANNEL3.2@166.035,74.041
NetR31_CHANNEL4_1: R31_CHANNEL4.1 U6_CHANNEL4.7 VD4_CHANNEL4.2 | length 6.4
  Top Layer w0.5: VD4_CHANNEL4.2@222.858,72.39 222.858,74.008 222.825,74.041 225.009,74.041 225.976,73.074 U6_CHANNEL4.7@225.976,71.882
NetR31_CHANNEL4_2: R31_CHANNEL4.2 R32_CHANNEL4.2 VD4_CHANNEL4.1 VT3_CHANNEL4.1 | length 5.4
  Top Layer w0.5: VT3_CHANNEL4.1@218.61,73.947 218.61,72.402 R32_CHANNEL4.2@218.598,72.39 VD4_CHANNEL4.1@220.458,72.39 220.558,72.39 221.035,72.867 R31_CHANNEL4.2@221.035,74.041
NetR40_1: R40.1 U10.1 | length 2.2
  Top Layer w0.3: R40.1@50,36.875 50.005,36.875 50.227,37.097 50.227,37.427 51.025,38.225 U10.1@51.025,38.675
NetR45_1: R45.1 R47.3 | length 4.9
  Top Layer w0.5: R47.3@132.725,23.51 135.835,23.51 137.1,24.775 R45.1@137.125,24.775
NetR46_1: R46.1 R48.2 U13.3 | length 5.2
  Top Layer w0.5: R46.1@168.3,42.6 168.275,42.6 167.825,43.05 R48.2@167.825,45.5 168.95,45.5 169.3,45.85 169.3,46 169.35,46.05 U13.3@169.6,46.05
NetR47_1: R47.1 R49.2 | length 7.1
  Top Layer w0.5: v2(137.8,29.7) 139.25,29.7 R49.2@139.3,29.75
  Bottom Layer w0.5: R47.1@132.725,28.59 133.835,29.7 v2(137.8,29.7)
NetR47_2: R47.2 U14.2 | length 12.1
  Top Layer w0.5: U14.2@142.275,26.275 143.475,26.275 v2(143.5,26.25)
  Bottom Layer w0.5: R47.2@132.725,26.05 132.859,26.184 133.277,26.184 133.343,26.25 v2(143.5,26.25)
NetR50_2: R50.2 VD7.2 | length 1.8
  Top Layer w1: VD7.2@159.625,33.4 R50.2@159.625,35.25
NetU1_1: U1.1 VD1.2 VD2.2 | length 21.8
  Top Layer w0.3: VD1.2@98.825,52.3 98.925,52.3 99.25,52.625 U1.1@99.25,53.975 99.25,54.825 99.7,55.275 104.7,55.275 105.15,54.825 107.625,54.825 108.575,55.775 115.3,55.775 116.825,57.3 VD2.2@116.925,57.3
NetU1_21: U1.21 U10.57 | length 87.4
  Top Layer w0.3: v2(47.725,44.425) U10.57@48.775,44.425 ; v2(102.616,57.023) 105.068,59.475 U1.21@106.25,59.475
  Bottom Layer w0.3: v2(47.725,44.425) 47.7,44.4 46.15,44.4 45.375,45.175 45.375,49.175 47.55,51.35 64.725,51.35 75.725,40.35 87.375,40.35 92.35,45.325 92.35,54.55 94.823,57.023 v2(102.616,57.023)
NetU1_22: U1.22 U10.58 | length 89
  Top Layer w0.3: v2(47.125,43.7) 47.179,43.7 47.404,43.925 U10.58@48.775,43.925 ; v2(103.251,58.928) 104.298,59.975 U1.22@106.25,59.975
  Bottom Layer w0.3: v2(47.125,43.7) 46.284,43.7 44.975,45.009 44.975,49.341 47.384,51.75 48.056,51.75 64.891,51.75 75.891,40.75 86.825,40.75 91.625,45.55 91.625,54.866 95.687,58.928 v2(103.251,58.928)
NetU1_45: U1.45 U10.60 | length 81.3
  Top Layer w0.3: v2(47.4,42.375) 47.95,42.925 U10.60@48.775,42.925 ; v2(90.05,52.75) 90.05,53.975 92.825,56.75 95.25,56.75 95.475,56.975 U1.45@97.75,56.975
  Bottom Layer w0.3: v2(47.4,42.375) 46.478,42.375 44.175,44.678 44.175,49.672 47.053,52.55 47.725,52.55 65.222,52.55 76.222,41.55 85.85,41.55 90.05,45.75 v2(90.05,52.75)
NetU1_46: U1.46 U10.59 | length 81.4
  Top Layer w0.3: v2(47.225,43) 47.65,43.425 U10.59@48.775,43.425 ; v2(90.932,50.292) 91.821,51.181 96.774,51.181 97.663,52.07 97.663,53.338 98.75,54.425 98.75,56.175 98.45,56.475 U1.46@97.75,56.475
  Bottom Layer w0.3: v2(47.225,43) 46.419,43 44.575,44.844 44.575,49.506 47.219,52.15 47.891,52.15 65.056,52.15 76.056,41.15 86.35,41.15 90.932,45.732 v2(90.932,50.292)
NRST: C10.2 R10.1 R15.2 U1.7 | length 92.9
  Top Layer w0.3: R15.2@35,62.25 53.325,62.25 57.05,58.525 v2(64.95,58.525) ; v2(76.35,47.175) 76.35,47.125 84.4,39.075 v2(86.575,39.075) ; v2(102.025,41.6) 102.025,42.975 R10.1@103.65,42.975 103.75,43.075 103.75,45.575 104.425,46.25 104.425,50.225 102.25,52.4 U1.7@102.25,53.975
  Bottom Layer w0.3: v2(64.95,58.525) 64.975,58.525 76.325,47.175 v2(76.35,47.175) ; v2(86.575,39.075) 99.5,39.075 v2(102.025,41.6)
OUT1: P5.1 R26_CHANNEL1.2 T1_CHANNEL1.5 | length 77.4
  Top Layer w1: T1_CHANNEL1.5@72.705,104.648 76.475,108.418 76.475,112.65 85.575,121.75 125.475,121.75 129.509,125.784 P5.1@129.509,128.571
  Bottom Layer w1: T1_CHANNEL1.5@72.705,104.648 76.003,101.35 77.35,101.35 R26_CHANNEL1.2@77.75,100.95
OUT2: P4.3 R26_CHANNEL2.2 T1_CHANNEL2.5 | length 33.3
  Top Layer w1: T1_CHANNEL2.5@127.705,104.648 131.475,108.418 131.475,120.25 134.509,123.284 P4.3@134.509,128.571
  Bottom Layer w1: T1_CHANNEL2.5@127.705,104.648 131.003,101.35 132.35,101.35 R26_CHANNEL2.2@132.75,100.95
OUT3: P4.2 R26_CHANNEL3.2 T1_CHANNEL3.5 | length 70.1
  Top Layer w1: P4.2@139.509,128.571 139.509,126.041 142.575,122.975 175.7,122.975 184.95,113.725 184.95,107.893 T1_CHANNEL3.5@181.705,104.648
  Bottom Layer w1: T1_CHANNEL3.5@181.705,104.648 185.003,101.35 186.35,101.35 R26_CHANNEL3.2@186.75,100.95
OUT4: P4.1 R26_CHANNEL4.2 T1_CHANNEL4.5 | length 118.1
  Top Layer w1: P4.1@144.509,128.571 226.354,128.571 238.475,116.45 238.475,106.418 T1_CHANNEL4.5@236.705,104.648
  Bottom Layer w1: T1_CHANNEL4.5@236.705,104.648 240.003,101.35 241.35,101.35 R26_CHANNEL4.2@241.75,100.95
PWM_LEFT1: R27_CHANNEL1.1 U1.30 U6_CHANNEL1.4 | length 69.2
  Top Layer w0.3: v2(101.775,61.25) 101.813,61.288 102.033,61.288 102.25,61.506 U1.30@102.25,62.475
  Top Layer w0.5: U6_CHANNEL1.4@64.516,66.548 66.042,66.548 R27_CHANNEL1.1@66.167,66.673 ; v1(65.775,65.375) 65.775,65.4 66.167,65.792 R27_CHANNEL1.1@66.167,66.673 ; R27_CHANNEL1.1@66.167,66.687 R27_CHANNEL1.1@66.167,66.673
  Bottom Layer w0.3: v1(65.775,65.375) 65.775,63.675 66.55,62.9 72.659,62.9 77.216,67.457 77.216,76.835 80.391,80.01 89.154,80.01 91.45,77.714 91.45,67.35 97.55,61.25 v2(101.775,61.25)
PWM_LEFT2: R27_CHANNEL2.1 U1.32 U6_CHANNEL2.4 | length 27.5
  Top Layer w0.3: U1.32@101.25,62.475 101.25,63.531 104.009,66.29 104.009,66.671 v2(104.013,66.675)
  Top Layer w0.5: U6_CHANNEL2.4@119.516,66.548 121.042,66.548 R27_CHANNEL2.1@121.167,66.673 ; v1(120.775,65.375) 120.775,65.4 121.167,65.792 R27_CHANNEL2.1@121.167,66.673 ; R27_CHANNEL2.1@121.167,66.687 R27_CHANNEL2.1@121.167,66.673
  Bottom Layer w0.3: v2(104.013,66.675) 104.013,67.564 104.474,68.025 118.125,68.025 v1(120.775,65.375)
PWM_LEFT3: R27_CHANNEL3.1 U1.26 U6_CHANNEL3.4 | length 82.5
  Top Layer w0.3: U1.26@104.25,62.475 104.25,63.356 105.791,64.897 v2(106.934,64.897)
  Top Layer w0.5: U6_CHANNEL3.4@173.516,66.548 175.042,66.548 R27_CHANNEL3.1@175.167,66.673 ; v1(174.775,65.375) 174.775,65.4 175.167,65.792 R27_CHANNEL3.1@175.167,66.673 ; R27_CHANNEL3.1@175.167,66.687 R27_CHANNEL3.1@175.167,66.673
  Bottom Layer w0.3: v2(106.934,64.897) 112.649,64.897 119.507,58.039 119.595,58.039 120.484,57.15 125.349,57.15 126.774,58.575 153.825,58.575 158.877,63.627 166.751,63.627 169.291,66.167 173.983,66.167 v1(174.775,65.375)
PWM_LEFT4: R27_CHANNEL4.1 U1.28 U6_CHANNEL4.4 | length 144.1
  Top Layer w0.3: U1.28@103.25,62.475 103.25,63.88 v2(105.029,65.659)
  Top Layer w0.5: U6_CHANNEL4.4@228.516,66.548 230.042,66.548 R27_CHANNEL4.1@230.167,66.673 ; v1(229.175,64.825) 229.2,64.825 230.167,65.792 R27_CHANNEL4.1@230.167,66.673 ; R27_CHANNEL4.1@230.167,66.687 R27_CHANNEL4.1@230.167,66.673
  Bottom Layer w0.3: v2(105.029,65.659) 112.541,65.659 120.625,57.575 124.975,57.575 126.375,58.975 153.463,58.975 158.623,64.135 166.026,64.135 169.591,67.7 176.459,67.7 183.284,60.875 190.116,60.875 193.041,63.8 228.2,63.8 229.175,64.775 v1(229.175,64.825)
PWM_RIGHT1: R33_CHANNEL1.1 U1.29 U6_CHANNEL1.2 | length 73.9
  Top Layer w0.3: v2(102.325,60.575) 102.325,60.629 102.75,61.054 U1.29@102.75,62.475
  Top Layer w0.5: v1(60.7,65.025) 60.925,64.8 R33_CHANNEL1.1@61.775,64.8 61.8,64.8 61.976,64.976 U6_CHANNEL1.2@61.976,66.548
  Bottom Layer w0.3: v1(60.7,65.025) 60.789,64.936 60.789,64.511 63.266,62.034 72.659,62.034 78.105,67.48 78.105,76.327 81.026,79.248 88.392,79.248 90.584,77.056 90.584,67.366 97.375,60.575 v2(102.325,60.575)
PWM_RIGHT2: R33_CHANNEL2.1 U1.31 U6_CHANNEL2.2 | length 21.1
  Top Layer w0.3: U1.31@101.75,62.475 101.75,63.269 v2(104.902,66.421)
  Top Layer w0.5: v1(115.7,65.025) 115.925,64.8 R33_CHANNEL2.1@116.775,64.8 116.8,64.8 116.976,64.976 U6_CHANNEL2.2@116.976,66.548
  Bottom Layer w0.3: v2(104.902,66.421) 104.902,67.195 105.332,67.625 113.1,67.625 v1(115.7,65.025)
PWM_RIGHT3: R33_CHANNEL3.1 U1.25 U6_CHANNEL3.2 | length 75.7
  Top Layer w0.3: U1.25@104.75,62.475 104.75,63.094 105.918,64.262 v2(107.696,64.262)
  Top Layer w0.5: v1(169.7,65.025) 169.925,64.8 R33_CHANNEL3.1@170.775,64.8 170.8,64.8 170.976,64.976 U6_CHANNEL3.2@170.976,66.548
  Bottom Layer w0.3: v2(107.696,64.262) 112.637,64.262 120.257,56.642 125.526,56.642 127.05,58.166 154.051,58.166 159.023,63.138 167.813,63.138 v1(169.7,65.025)
PWM_RIGHT4: R33_CHANNEL4.1 U1.27 U6_CHANNEL4.2 | length 138.9
  Top Layer w0.3: U1.27@103.75,62.475 103.75,63.491 105.791,65.532 v2(105.791,66.294)
  Top Layer w0.5: v1(224.7,65.025) 224.925,64.8 R33_CHANNEL4.1@225.775,64.8 225.8,64.8 225.976,64.976 U6_CHANNEL4.2@225.976,66.548
  Bottom Layer w0.3: v2(105.791,66.294) 105.845,66.294 106.194,66.643 106.763,66.643 106.82,66.7 112.066,66.7 120.791,57.975 124.809,57.975 126.209,59.375 153.297,59.375 158.565,64.643 165.968,64.643 169.425,68.1 176.625,68.1 183.45,61.275 189.95,61.275 192.875,64.2 223.875,64.2 v1(224.7,65.025)
REF: C51.2 P8.1 R44.1 R45.2 U1.13 U1.15 U1.17 U1.19 U2.3 U2.5 U2.10 U2.12 U3_CHANNEL1.5 U3_CHANNEL2.5 U3_CHANNEL3.5 U3_CHANNEL4.5 U14.1 | length 331.9
  Top Layer w0.3: U1.13@106.25,55.475 105.2,55.475 104.825,55.85 104.825,56.425 ; U1.17@106.25,57.475 104.825,57.475 ; U1.19@106.25,58.475 105.125,58.475 104.825,58.175 104.825,57.475 ; v1(115.85,58.475) 114.425,57.05 108.3,57.05 107.725,56.475 U1.15@106.25,56.475 104.875,56.475 104.825,56.425 ; U2.5@141.825,56.775 141.9,56.7 142.957,56.7 143.191,56.466 v2@143.245,56.466 ; U2.3@141.825,58.075 144.7,58.075 U2.12@147.625,58.075 ; v2(146.275,56.4) 146.575,56.7 147.55,56.7 U2.10@147.625,56.775 ; 104.825,56.425 104.825,57.475
  Top Layer w0.5: v1(133.275,90.85) 133.275,81.225 v1(134.7,79.8) ; R44.1@136.225,28.625 136.225,27.625 137.575,26.275 C51.2@138.65,26.275 ; R45.2@138.625,24.775 138.638,24.787 138.638,26.263 C51.2@138.65,26.275 ; U14.1@140.375,26.25 140.45,26.175 140.45,25.875 141.445,24.88 P8.1@146.45,24.88 ; U14.1@140.375,26.275 C51.2@138.65,26.275 ; v2(144.7,56.4) 144.7,58.075 v1(144.7,69.825)
  Bottom Layer w0.5: U3_CHANNEL1.5@68.765,88.409 68.765,88.509 69.165,88.909 69.265,88.909 71.181,90.825 122.675,90.825 123.765,89.735 ; v1(115.85,58.475) 121.225,53.1 131.702,53.1 136.651,48.151 140.901,48.151 143.925,51.175 144.7,51.175 ; U3_CHANNEL2.5@123.765,88.409 123.765,89.735 ; v1(134.7,79.8) 134.725,79.8 v1(144.7,69.825) ; v2@143.311,56.4 v2(144.7,56.4) ; v2(146.275,56.4) v2(144.7,56.4) ; P8.1@146.45,24.88 147.83,24.88 148.925,25.975 148.925,31.25 146.725,33.45 145.05,33.45 143.025,35.475 143.025,40.85 147.5,45.325 147.5,48.375 144.7,51.175 ; U3_CHANNEL3.5@177.765,88.409 177.765,89.49 ; U3_CHANNEL4.5@232.765,88.409 232.765,89.66 229.95,92.475 180.75,92.475 177.765,89.49 ; 123.765,89.735 124.88,90.85 v1(133.275,90.85) 166.95,90.85 168.55,92.45 174.805,92.45 177.765,89.49 ; 144.7,51.175 v2(144.7,56.4)
  other v2: 143.245,56.4
RX_N: P6.6 R35.1 U10.5 | length 14.1
  Top Layer w0.3: U10.5@53.025,38.675 53.025,32.699 54.599,31.125 56.66,31.125 P6.6@57.995,29.79
  Bottom Layer w0.5: P6.6@57.995,29.79 57.998,29.793 57.998,31.748 R35.1@58,31.75
RX_P: P6.3 R36.1 U10.4 | length 14.1
  Top Layer w0.3: U10.4@52.525,38.675 52.525,32.492 54.185,30.832 P6.3@54.185,27.25
  Bottom Layer w0.5: P6.3@54.185,27.25 54.251,27.184 54.251,25.391 R36.1@54.317,25.325
SIGNAL_U_CHANNEL1: R30_CHANNEL1.1 R34_CHANNEL1.2 U4_CHANNEL1.3 | length 23.5
  Top Layer w1: v1(62.325,116.175) 66.625,116.175 71.35,111.45 v1(71.35,107.075)
  Bottom Layer w0.5: U4_CHANNEL1.3@69.584,107.057 71.282,107.057 71.3,107.075 v1(71.35,107.075)
  Bottom Layer w1: R34_CHANNEL1.2@56.5,115.05 57.2,115.05 57.6,115.45 57.6,115.512 58.186,116.098 R30_CHANNEL1.1@60.45,116.098 60.527,116.175 v1(62.325,116.175)
SIGNAL_U_CHANNEL2: R30_CHANNEL2.1 R34_CHANNEL2.2 U4_CHANNEL2.3 | length 23.8
  Top Layer w1: v1(117.275,116.1) 122.375,116.1 126.35,112.125 v1(126.35,107.075)
  Bottom Layer w0.5: U4_CHANNEL2.3@124.584,107.057 126.282,107.057 126.3,107.075 v1(126.35,107.075)
  Bottom Layer w1: R34_CHANNEL2.2@111.5,115.05 112.2,115.05 112.6,115.45 112.6,115.512 113.186,116.098 117.273,116.098 v1(117.275,116.1)
SIGNAL_U_CHANNEL3: R30_CHANNEL3.1 R34_CHANNEL3.2 U4_CHANNEL3.3 | length 22.4
  Top Layer w1: v1(171.15,116.1) 174.05,116.1 180.35,109.8 v1(180.35,107.075)
  Bottom Layer w0.5: U4_CHANNEL3.3@178.584,107.057 180.282,107.057 180.3,107.075 v1(180.35,107.075)
  Bottom Layer w1: R34_CHANNEL3.2@165.5,115.05 166.2,115.05 166.6,115.45 166.6,115.512 167.186,116.098 R30_CHANNEL3.1@169.45,116.098 169.452,116.1 v1(171.15,116.1)
SIGNAL_U_CHANNEL4: R30_CHANNEL4.1 R34_CHANNEL4.2 U4_CHANNEL4.3 | length 22.6
  Top Layer w1: v1(226.225,115.925) 229.55,115.925 235.35,110.125 v1(235.35,107.075)
  Bottom Layer w0.5: U4_CHANNEL4.3@233.584,107.057 235.282,107.057 235.3,107.075 v1(235.35,107.075)
  Bottom Layer w1: R34_CHANNEL4.2@220.5,115.05 221.2,115.05 221.6,115.45 221.6,115.512 222.186,116.098 R30_CHANNEL4.1@224.45,116.098 224.623,115.925 v1(226.225,115.925)
SWCLK: R13.2 U1.37 | length 69.4
  Top Layer w0.3: R13.2@35,58.25 54.9,58.25 57.675,55.475 72.025,55.475 81.413,64.863 93.387,64.863 97.275,60.975 U1.37@97.75,60.975
SWDIO: R14.2 U1.34 | length 76.6
  Top Layer w0.3: R14.2@35,60.25 54,60.25 57.575,56.675 72.25,56.675 82.925,67.35 92.67,67.35 93.472,66.548 100.457,66.548 101.346,65.659 101.346,64.389 100.25,63.293 U1.34@100.25,62.475
TX_N: P6.2 R37.1 U10.8 | length 16.5
  Top Layer w0.3: v2@54.525,34.191 U10.8@54.525,38.675
  Bottom Layer w0.3: P6.2@52.899,29.774 52.134,29.009 51.886,29.009 51.71,29.185 51.71,30.125 54.525,32.939 54.525,33.809 54.537,33.82 54.537,33.962 v2(54.575,34)
  Bottom Layer w0.5: R37.1@52.883,25.325 52.899,25.341 52.899,29.774 P6.2@52.915,29.79
TX_P: P6.1 R38.1 U10.7 | length 14.8
  Top Layer w0.3: v2(53.975,34) 54.013,34.038 54.013,34.18 54.025,34.191 54.025,38.225 U10.7@54.025,38.675
  Bottom Layer w0.3: P6.1@51.645,27.25 51.669,27.274 51.669,28.52 51.21,28.978 51.21,30.332 54.025,33.146 54.025,33.809 54.013,33.82 54.013,33.962 v2(53.975,34)
  Bottom Layer w0.5: R38.1@51.45,25.325 51.548,25.423 51.548,27.153 P6.1@51.645,27.25
U1: C1.2 R3.2 R3.3 U1.12 U2.7 | length 45.3
  Top Layer w0.3: U1.12@104.75,53.975 104.75,53.525 104.838,53.437 106.862,53.437 108.675,55.25 116.6,55.25 117.856,56.506 117.856,57.431 118.6,58.175 122.325,58.175 123.725,56.775 125.925,56.775 v1(128.275,54.425) ; C1.2@140,54.6 140.101,54.701 140.601,54.701 141.25,55.35 141.25,55.4 141.325,55.475 U2.7@141.825,55.475
  Top Layer w0.5: R3.2@136.4,52.85 R3.3@136.4,55.39 136.589,55.39 137.379,54.6 C1.2@140,54.6
  Bottom Layer w0.3: v1(128.275,54.425) 135.435,54.425 R3.3@136.4,55.39
U2: C2.2 R5.2 R5.3 U1.18 U2.1 | length 39.7
  Top Layer w0.3: U1.18@106.25,57.975 112.966,57.975 114.941,59.95 v1(123.825,59.95) ; C2.2@140.222,60.048 140.652,60.048 141.325,59.375 U2.1@141.825,59.375
  Top Layer w0.5: R5.2@136.4,63.525 R5.3@136.4,60.985 136.589,60.985 137.299,60.275 C2.2@140,60.275
  Bottom Layer w0.3: v1(123.825,59.95) 124.86,60.985 R5.3@136.4,60.985
U3: C4.2 R7.2 R7.3 U1.14 U2.14 | length 56.8
  Top Layer w0.3: U1.14@106.25,55.975 108.075,55.975 108.487,56.387 114.934,56.387 117.197,58.65 v1(123.825,58.65) ; U2.14@147.625,59.375 148.125,59.375 148.798,60.048 C4.2@149.178,60.048
  Top Layer w0.5: C4.2@149.4,60.275 152.051,60.275 152.711,60.935 R7.3@152.9,60.935 R7.2@152.9,63.475
  Bottom Layer w0.3: v1(123.825,58.65) 125.1,59.925 151.89,59.925 R7.3@152.9,60.935
U4: C8.2 R11.2 R11.3 U1.16 U2.8 | length 58.4
  Top Layer w0.3: U1.16@106.25,56.975 107.648,56.975 108.204,57.531 113.531,57.531 115.3,59.3 125.25,59.3 v1(128.725,55.825) ; U2.8@147.625,55.475 148.125,55.475 148.723,54.877 C8.2@149.178,54.877
  Top Layer w0.5: C8.2@149.4,54.65 151.921,54.65 152.661,55.39 R11.3@152.85,55.39 R11.2@152.85,52.85
  Bottom Layer w0.3: v1(128.725,55.825) 134.55,55.825 135.856,57.131 151.109,57.131 R11.3@152.85,55.39
V1: C1.1 R4.1 U2.6 U3_CHANNEL1.6 | length 102.1
  Top Layer w0.3: C1.1@140,56.1 140.012,56.112 141.813,56.112 U2.6@141.825,56.125 141.9,56.05 142.725,56.05 143.125,55.65 143.125,52.126 143.173,52.078 143.173,51.902 R4.1@143.375,51.7
  Top Layer w0.5: v1(131.675,63.05) 131.675,61.35 135.475,57.55 138.575,57.55 140,56.125 C1.1@140,56.1
  Bottom Layer w0.5: U3_CHANNEL1.6@66.225,88.409 66.551,88.083 66.551,87.274 67.3,86.525 70.725,86.525 71.775,87.575 113.075,87.575 116.85,83.8 116.85,74.875 128.675,63.05 v1(131.675,63.05)
V2: C2.1 R6.1 U2.2 U3_CHANNEL2.6 | length 46.6
  Top Layer w0.3: C2.1@140,58.775 140.025,58.75 141.8,58.75 U2.2@141.825,58.725 143.025,58.725 143.375,59.075 R6.1@143.375,61.225
  Top Layer w0.5: v1(132.675,63.85) 132.675,61.875 135.775,58.775 C2.1@140,58.775
  Bottom Layer w0.5: U3_CHANNEL2.6@121.225,88.409 121.225,86.65 119.95,85.375 119.95,83.15 132.675,70.425 v1(132.675,63.85)
V3: C4.1 R8.1 U2.13 U3_CHANNEL3.6 | length 60
  Top Layer w0.3: R8.1@146,61.225 146,59.3 146.575,58.725 U2.13@147.625,58.725 147.65,58.75 149.375,58.75 C4.1@149.4,58.775
  Top Layer w0.5: C4.1@149.4,58.775 155.175,58.775 157.48,61.08 v1(157.48,65.913) ; v3(157.45,78.825) 157.45,84.675 162.9,90.125 v3(175.275,90.125)
  Bottom Layer w0.5: v3(157.45,78.825) 157.465,78.81 157.465,65.928 v1(157.48,65.913) ; U3_CHANNEL3.6@175.225,88.409 175.25,88.434 175.25,90.1 v3(175.275,90.125)
V4: C8.1 R12.1 U2.9 U3_CHANNEL4.6 | length 120.3
  Top Layer w0.3: R12.1@146,51.7 146,51.745 146.35,52.095 146.35,55.675 146.725,56.05 147.55,56.05 U2.9@147.625,56.125 147.637,56.138 149.387,56.138 C8.1@149.4,56.15
  Top Layer w0.5: C8.1@149.4,56.15 149.4,56.175 149.525,56.3 149.55,56.3 150.3,57.05 v1(155.625,57.05)
  Bottom Layer w0.5: v1(155.625,57.05) 159.3,60.725 177.908,60.725 179.832,58.801 192.405,58.801 196.054,62.45 229.075,62.45 231.85,65.225 231.85,70 228.725,73.125 228.725,85.375 230.225,86.875 U3_CHANNEL4.6@230.225,88.409
pads on no net: P1.0 P1.1 P2.1 P2.2 P2.3 P2.4 P2.5 P2.6 P6. P6.7 S1.0 U3_CHANNEL1.7 U3_CHANNEL1.8 U3_CHANNEL2.7 U3_CHANNEL2.8 U3_CHANNEL3.7 U3_CHANNEL3.8 U3_CHANNEL4.7 U3_CHANNEL4.8 U6_CHANNEL1.1 U6_CHANNEL1.8 U6_CHANNEL2.1 U6_CHANNEL2.8 U6_CHANNEL3.1 U6_CHANNEL3.8 U6_CHANNEL4.1 U6_CHANNEL4.8 U7_CHANNEL1.4 U7_CHANNEL1.5 U7_CHANNEL2.4 U7_CHANNEL2.5 U7_CHANNEL3.4 U7_CHANNEL3.5 U7_CHANNEL4.4 U7_CHANNEL4.5 U9_CHANNEL1.4 U9_CHANNEL1.8 U9_CHANNEL2.4 U9_CHANNEL2.8 U9_CHANNEL3.4 U9_CHANNEL3.8 U9_CHANNEL4.4 U9_CHANNEL4.8 U10.14 U10.15 U10.16 U10.22 U10.23 U10.24 U10.25 U10.26 U10.27 U10.30 U10.31 U10.32 U10.33 U10.34 U10.35 U10.38 U10.39 U10.46 U10.47 U10.49 U10.50 U10.51 U10.55 U10.56 U10.61 U10.62

## Polygon pours and split planes (outlines as drawn)
GND on Bottom Layer "NONET_L-01_P-001" (solid, remove dead copper, pour order 0): 159.975,60.075 176.45,60.075 177.75,58.775 177.75,41.45 177.025,40.725 167.25,40.725 155.75,52.225 155.75,55.85
GND on Bottom Layer "NONET_L-01_P-001" (solid, pour order 1): 147.125,40.475 153.575,40.475 156.2,40.475 157.125,39.55 157.125,34.975 156.4,34.25 145.95,34.25 144.05,36.15 144.05,37.4
GND on Bottom Layer "NONET_L-01_P-001" (solid, remove dead copper, pour order 4): 50.825,51 58.65,51 61,48.65 61,40.75 59,38.75 50.5,38.75 48.5,40.75 48.5,48.675
GND on Top Layer "NONET_L-01_P-001" (solid, remove dead copper, pour order 2): 50.927,49.784 58.547,49.784 59.817,48.514 59.817,41.529 58.547,40.259 50.165,40.259 49.911,40.513 49.911,48.768
GND on Top Layer "Top Layer-GND" (solid, remove dead copper, pour order 29): 235.325,60.425 237.5,62.6 237.5,74.225 234.525,74.25 234.525,72.425 232.525,70.425 232.525,66.25 230.2,63.925 225,63.925 221.525,67.4 220.3,67.4 217.55,70.15 217.55,74.275 214.55,74.275 214.525,74.3 214.525,69.725 213.875,69.075 183.025,69.075 182.5,69.6 182.5,74.225 179.525,74.25 179.525,68.25 175.2,63.925 169.628,63.925 166.153,67.4 165.3,67.4 162.55,70.15 162.55,74.275 159.55,74.275 159.525,74.3 159.561,72.011 158.9,71.35 153.35,71.35 144.475,80.225 137.5,80.225 131.975,74.7 131.975,71.725 129.725,69.475 129.125,69.475 128.5,70.1 128.5,74.225 125.525,74.25 125.525,74.242 125.525,68.25 121.2,63.925 116,63.925 112.525,67.4 111.3,67.4 108.55,70.15 108.55,74.275 105.55,74.275 105.525,74.3 105.525,70.993 97.907,70.993 88.382,80.518 79.918,80.518 76.475,77.075 76.475,70.225 75.725,69.475 73.875,69.475 73.5,69.85 73.5,74.225 70.525,74.25 70.525,68.25 66.2,63.925 61,63.925 57.525,67.4 56.3,67.4 53.55,70.15 53.55,74.275 50.55,74.275 50.525,74.3 50.525,67.15 52.925,64.75 52.95,64.75 57.275,60.425 74.225,60.425 81.8,68 81.8,76.75 82.625,77.575 85.75,77.575 96.175,67.15 105.525,67.15 107.925,64.75 107.95,64.75 112.275,60.425 128.225,60.425 138.425,70.625 146.7,70.625 150.175,67.15 158.575,67.15 166.75,58.975 179.45,58.975 184.775,64.3 189.3,64.3 193.175,60.425
NetC19_CHANNEL2_2 on Top Layer "NONET_L-01_P-001" (solid, remove dead copper, pour order 10): 107,85.375 105.4,83.775 105.4,78.1 109.975,78.1 110,78.125 110,83.75 108.4,85.35
NetR24_CHANNEL2_2 on Top Layer "NONET_L-01_P-001" (solid, remove dead copper, pour order 11): 127,85.375 125.4,83.775 125.4,78.1 129.975,78.1 130,78.125 130,83.75 128.4,85.35
NetR24_CHANNEL4_2 on Top Layer "NONET_L-01_P-001" (solid, remove dead copper, pour order 17): 236,85.375 234.4,83.775 234.4,78.1 238.975,78.1 239,78.125 239,83.75 237.4,85.35
NetC19_CHANNEL4_2 on Top Layer "NONET_L-01_P-001" (solid, remove dead copper, pour order 16): 216,85.375 214.4,83.775 214.4,78.1 218.975,78.1 219,78.125 219,83.75 217.4,85.35
NetR24_CHANNEL3_2 on Top Layer "NONET_L-01_P-001" (solid, remove dead copper, pour order 14): 181,85.375 179.4,83.775 179.4,78.1 183.975,78.1 184,78.125 184,83.75 182.4,85.35
NetC19_CHANNEL3_2 on Top Layer "NONET_L-01_P-001" (solid, remove dead copper, pour order 13): 161,85.375 159.4,83.775 159.4,78.1 163.975,78.1 164,78.125 164,83.75 162.4,85.35
NetR24_CHANNEL1_2 on Top Layer "NONET_L-01_P-001" (solid, remove dead copper, pour order 6): 72,85.375 70.4,83.775 70.4,78.1 74.975,78.1 75,78.125 75,83.75 73.4,85.35
NetC19_CHANNEL1_2 on Top Layer "NONET_L-01_P-001" (solid, remove dead copper, pour order 5): 52,85.375 50.4,83.775 50.4,78.1 54.975,78.1 55,78.125 55,83.75 53.4,85.35

## Silkscreen, mask and mechanical layers (free items; w line width, h text height)
Board:
  the board outline again, w0.15